# Altium PCB PCB1.PcbDoc
Units mm, origin at the board's own origin, x right, y up, seen from the top; angles counter-clockwise.
Board outline 75.8 x 25.8 mm, 2 copper layers (Top Layer, Bottom Layer), stack 0.771 mm thick; 54 components, 33 nets, 189 pads, 183 vias.
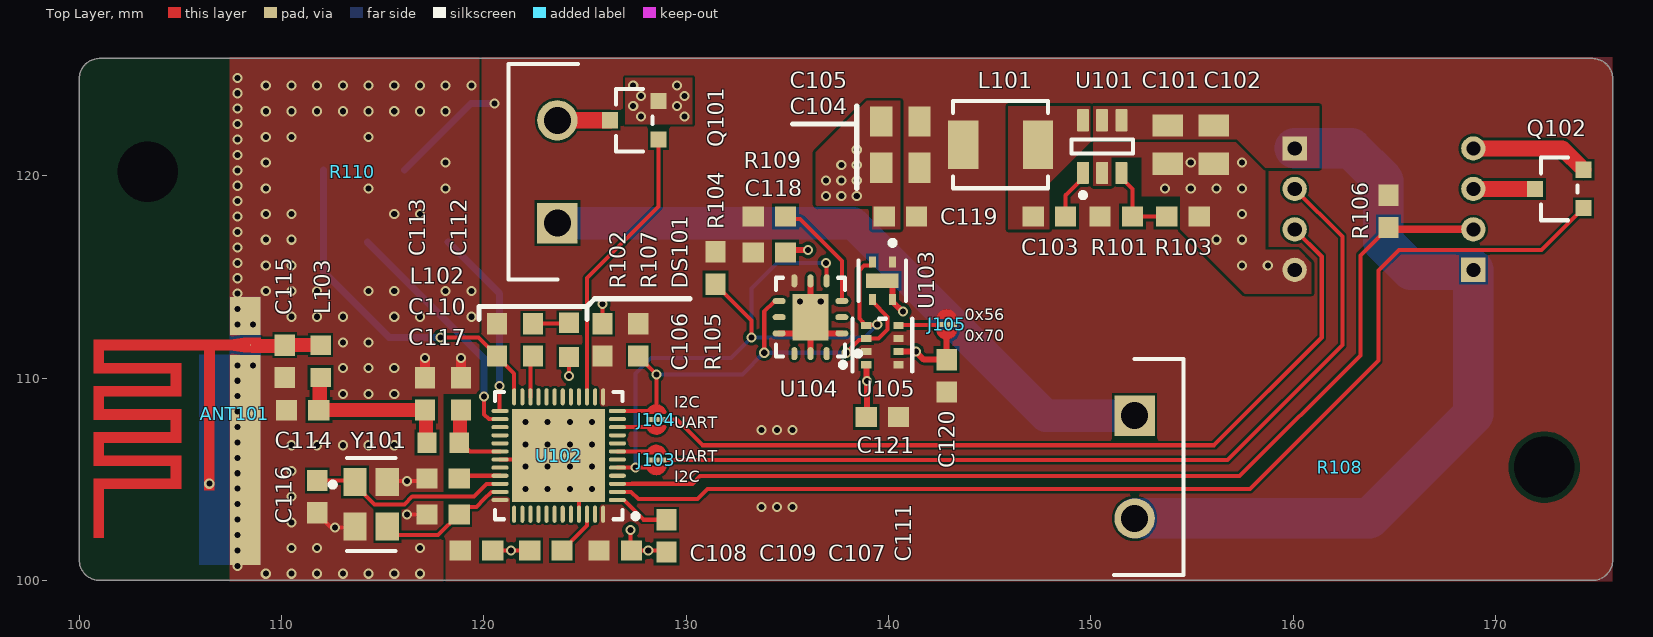
[diagram p0: Top Layer view]
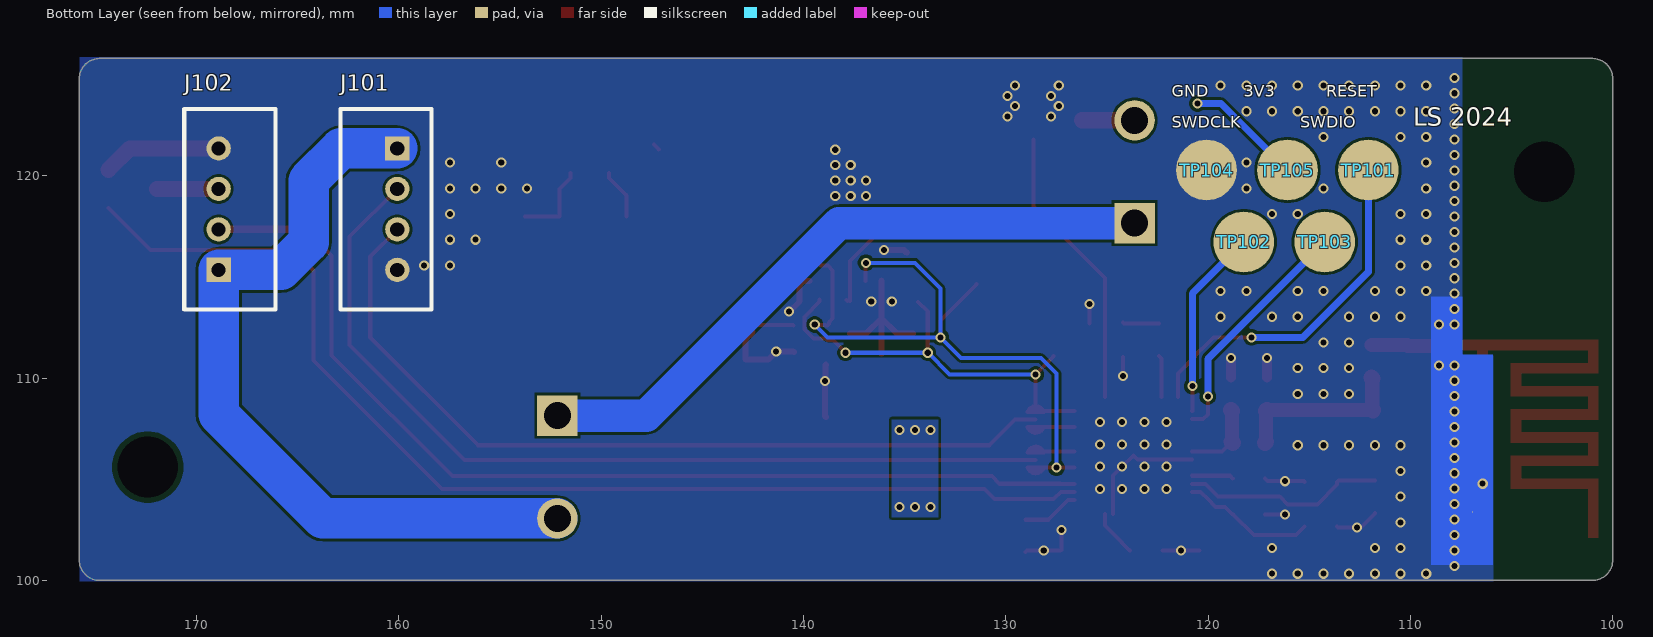
[diagram p1: Bottom Layer view, seen from below]
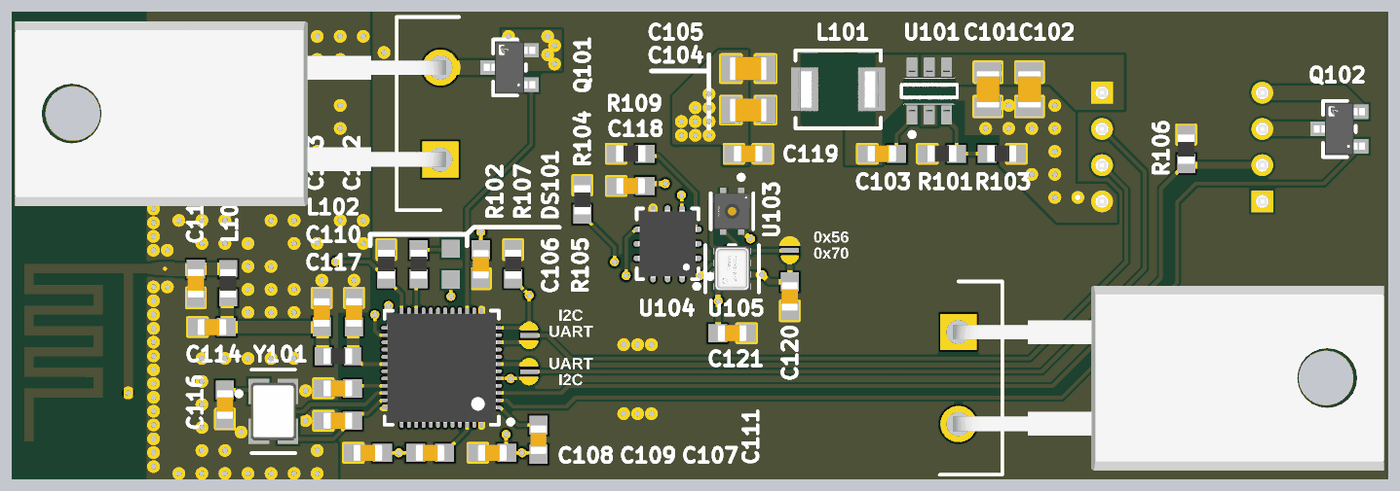
[diagram p2: 3D render of the assembled board from above, using the file's embedded part models]

## Layer stack, top to bottom
Top Solder: solder mask 0.0102, Solder Resist, Dk 3.5
Top Layer: signal copper 0.0356
Dielectric 1: dielectric 0.7, FR-4, Dk 4.8
Bottom Layer: signal copper 0.0356
Bottom Solder: solder mask 0.0102, Solder Resist, Dk 3.5

## Board outline
100,101 100,124.8 cw(c101,124.8) 101,125.8 174.8,125.8 cw(c174.8,124.8) 175.8,124.8 175.8,101 cw(c174.8,101) 174.8,100 101,100 cw(c101,101)

## Design rules (kind name [scope] priority, off if disabled: settings)
Clearance [All] p1: gap=0.127 ignorepadtopadclearanceinfootprint=TRUE except(0.254: Arc-Hole Track-Hole SMDPad-Hole THPad-THPad THPad-Hole Via-Hole Fill-Hole Poly-Hole Region-Hole Text-Hole)
PolygonConnect [All] p1: connectstyle=Direct reliefconductorwidth=0.254 reliefentries=4 polygonreliefangle="90 Angle" airgapwidth=0.254
RoutingVias [All] p1: holewidth=0.3 width=0.5 viastyle="Through Hole" minholewidth=0.3 minwidth=0.5 maxholewidth=2539.975 maxwidth=2539.975
SolderMaskExpansion SolderMaskExpansion_VIA [IsVia] p1: expansion=-100 istentingtop=FALSE
SolderMaskExpansion [All] p2: expansion=0.102 istentingtop=FALSE
SupplyNets "Schematic Supply Nets_2" [InNet('GND')] p1: voltage=0.000
SupplyNets "Schematic Supply Nets_1" [InNet('+3V3')] p2: voltage=0.000
SupplyNets "Schematic Supply Nets" [InNet('+24')] p3: voltage=0.000
Width [All] p1: maxlimit=254 minlimit=0.127 preferedwidth=0.2
30 further rules are at their usual default settings.

## Components (designator, comment, footprint, x,y, rotation, side; value= is the part's Value field where it differs from the comment)
ANT101 "BT_ANT" INV_F_2.4_50R2L08mm 108.967,114.05 r270 top
C101 "4u7" CAPC2013X13N 153.797,121.539 r90 top value=1p
C102 "4u7" CAPC2013X13N 156.083,121.539 r90 top value=1p
C103 "100n" CAPC1608X09N 147.955,117.983 r180 top value=1p
C104 "10u" CAPC2013X13N 140.589,120.396 r0 top value=1p
C105 "10u" CAPC2013X13N 140.589,122.682 r0 top value=1p
C106 "100n" CAPC1608X09N 125.857,111.887 r270 top value=1p
C107 "100n" CAPC1608X09N 126.492,101.473 r180 top value=1p
C108 "4u7" CAPC1608X09N 119.634,101.473 r180 top value=1p
C109 "1u" CAPC1608X09N 123.063,101.473 r0 top value=1p
C110 "100p" CAPC1608X09N 117.983,105.029 r180 top value=1p
C111 "100n" CAPC1608X09N 129.032,102.197 r270 top value=1p
C112 "0p8" CAPC1608X09N 118.872,109.22 r270 top value=1p
C113 "Capacitor" CAPC1608X09N 117.094,109.22 r270 top value=1p
C114 "Capacitor" CAPC1608X09N 111.043,108.413 r0 top locked value=1p
C115 "Capacitor" CAPC1608X09N 110.154,110.826 r90 top locked value=1p
C116 "12p" CAPC1608X09N 111.76,104.14 r90 top value=1p
C117 "12p" CAPC1608X09N 117.983,103.251 r0 top value=1p
C118 "100n" CAPC1608X09N 134.112,116.205 r180 top value=1p
C119 "100n" CAPC1608X09N 140.589,117.983 r0 top value=1p
C120 "1u" CAPC1608X09N 142.875,110.109 r270 top value=1p
C121 "1u" CAPC1608X09N 139.7,108.077 r0 top value=1p
DS101 "KP-1608SECK" KING-0603LED_ORANGE_V 124.206,111.887 r90 top
J101 "B4B-PH-K(LF)(SN)" FP-B4B-PH-K_LF_SN-MFG 160.63,118.35 r90 bottom locked
J102 "B4B-PH-K(LF)(SN)" FP-B4B-PH-K_LF_SN-MFG 168.36,118.35 r270 bottom locked
J103 "Solder Jumper" Solderbridge_3Way_New#1 128.524,106.46 r270 top
J104 "Solder Jumper" Solderbridge_3Way_New#2 128.524,107.442 r90 top
J105 "Solder Jumper" Solderbridge_3Way_New#3 142.875,112.141 r90 top
L101 "12uH" FP-SRP4020TA-MFG 145.542,121.539 r180 top
L102 "3n9" INDC1608X06N 117.983,106.807 r180 top
L103 "Inductor" INDC1608X06N 111.932,110.826 r90 top locked
Q101 "AO3400A" FP-SOT23-MFG 127.438,122.742 r180 top
Q102 "AO3400A" FP-SOT23-MFG 173.158,119.35 r180 top
R101 "51k" RESC1608X06N 151.257,117.983 r180 top
R102 "10k" RESC1608X06N 120.65,111.887 r90 top
R103 "22k1" RESC1608X06N 154.559,117.983 r180 top
R104 "10k" RESC1608X06N 131.445,115.443 r90 top
R105 "10k" RESC1608X06N 127.635,111.887 r90 top
R106 "<1k" RESC1608X06N 164.719,118.237 r90 top
R107 "470R" RESC1608X06N 122.428,111.887 r90 top
R108 "10R" TO508P344X1041X2058-2P_FLAT 152.17,108.14 r270 top
R109 "DNP" RESC1608X06N 134.112,117.983 r180 top
R110 "10R" TO508P344X1041X2058-2P_FLAT 123.63,117.66 r90 top locked
TP101 "TestPoint" TestPoint_3mm 112.078,120.284 r90 top
TP102 "TestPoint" TestPoint_3mm 118.238,116.728 r90 top
TP103 "TestPoint" TestPoint_3mm 114.238,116.728 r90 top
TP104 "TestPoint" TestPoint_3mm 120.078,120.284 r90 top
TP105 "TestPoint" TestPoint_3mm 116.078,120.284 r90 top
U101 "TPS560430XDBVR" FP-DBV0006A-MFG 150.561,121.442 r90 top
U102 "NRF52832" QFN40P600X600X85_HS-49N 123.698,106.172 r180 top locked
U103 "SHTC3" FP-SHTC3-MFG 139.7,114.808 r270 top
U104 "Smart CO2 sensor based on thermal conductivity" QFN80P300X350X110_HS-13N 136.144,113.008 r180 top
U105 "2SMPB-02E" FP-2SMPB-02E-MFG 139.7,111.633 r180 top
Y101 "3225 XO 32MHz" FP-TSX-3225-MFG 114.427,103.759 r270 top

## Footprints (in the part's own frame and the unit in brackets; to place one, negate y for a bottom-side part, rotate by r counter-clockwise, add the part's x,y. Pads: shape width x height; smd on the part's side, far side on the other; paste and mask are expansions set on the pad)
CAPC1608X09N [mm] "Chip Capacitor, 2-Leads, Body 1,55x0,85mm, IPC Medium Density"
  rect 1.05x1 smd: 1(-0.8,0) 2(0.8,0)
  body extent -0.8,-0.45 0.8,0.45, height 0.9
CAPC2013X13N [mm] "Chip Capacitor, 2-Leads, Body 2,03x1,27mm, IPC Medium Density"
  rect 1.1x1.5 smd: 1(-0.95,0) 2(0.95,0)
  body extent -1.01,-0.64 1.01,0.64, height 1.27
FP-2SMPB-02E-MFG [mm]
  rect 0.5x0.35 smd paste+0 mask+0: 1(0.8,0.975) 2(0.8,0.325) 3(0.8,-0.325) 4(0.8,-0.975) 5(-0.8,-0.975) 6(-0.8,-0.325) 7(-0.8,0.325) 8(-0.8,0.975)
  silkscreen extent -1.48,-1.3 2.07,1.3, body extent -1.55,-1.8 1.55,1.8, height 0.25
FP-B4B-PH-K_LF_SN-MFG [mm]
  rect 1.2x1.2 hole 0.7 paste-2539.97 mask+0: 1(3,-0.55)
  round 1.2 hole 0.7 paste-2539.97 mask+0: 2(1,-0.55) 3(-1,-0.55) 4(-3,-0.55)
  silkscreen extent -4.95,-2.25 4.95,2.25, body extent -4.95,-2.25 4.95,2.25, height 6
FP-DBV0006A-MFG [mm]
  rrect17% 1.1x0.6 smd paste+0 mask+0: 1(-1.3,0.95) 2(-1.3,0) 3(-1.3,-0.95) 4(1.3,-0.95) 5(1.3,0) 6(1.3,0.95)
  silkscreen extent -2.52,-1.53 0.35,1.53, body extent -1.95,-1.78 1.95,1.78, height 0.25
FP-SHTC3-MFG [mm]
  rect 0.55x0.35 smd paste-1000 mask-1000: 1(-0.925,0.5) 2(-0.925,-0.5) 3(0.925,-0.5) 4(0.925,0.5)
  rect 0.7x1.6 smd paste-1000 mask+0: 5(0,0)
  silkscreen extent -2,-1.17 1,1.17, body extent -1.4,-1.1 1.4,1.1, height 0.25
FP-SOT23-MFG [mm]
  rect 0.8x0.8 smd paste+0 mask+0: 1(-1.2,0.95) 2(-1.2,-0.95) 3(1.2,0)
  silkscreen extent -0.9,-1.55 0.9,1.55, body extent -1.7,-1.78 1.7,1.78, height 0.25
FP-SRP4020TA-MFG [mm]
  rect 1.5x2.4 smd paste+0 mask+0: 1(-1.85,0) 2(1.85,0)
  silkscreen extent -2.35,-2.15 2.35,2.15, body extent -2.7,-2.25 2.7,2.25, height 0.25
FP-TSX-3225-MFG [mm]
  rect 1.4x1.15 smd paste+0 mask+0: 1(-1.1,-0.8) 2(1.1,-0.8) 3(1.1,0.8) 4(-1.1,0.8)
  silkscreen extent -2.3,-2.02 2.3,1.2, body extent -1.9,-1.48 1.9,1.48, height 0.25
INDC1608X06N [mm] "Chip Inductor, 2-Leads, Body 1,55x0,85mm, IPC Medium Density"
  rect 0.95x1 smd: 1(-0.8,0) 2(0.8,0)
  body extent -0.8,-0.45 0.8,0.45, height 0.6
INV_F_2.4_50R2L08mm [mil]
  round 1 smd: 1(95.15,-20.05)
  rect 74.45x60 smd paste-1000 mask-1000: 2(38.5,-30)
  rect 408.74x60 smd paste-1000 mask-1000: 2(318.5,-30)
  round 1 smd far side mask-1000: 2(420,-80)
  Top Layer region: 80.65,-0.05 109.55,-0.05 109.55,-33.96 105.14,-60.05 105.14,-89.57 378.15,-90.05 378.15,-110.05 105.14,-110.05 105.14,-305.05 130.15,-305.05 130.15,-155.05 195.15,-155.05 195.15,-305.05 220.13,-305.05 220.13,-155.05 285.15,-155.05 285.15,-305.05 310.15,-305.05 310.15,-155.05 375.15,-155.05 375.15,-305.05 470.15,-305.05 470.15,-325.05 355.15,-325.05 355.15,-175.05 330.45,-175.05 330.15,-325.05 265.15,-325.05 265.15,-175.05 240.13,-175.05 240.13,-325.05 175.15,-325.05 175.15,-175.05 150.15,-175.05 150.15,-325.05 85.14,-325.05 85.14,-60.05 80.65,-33.84
  Bottom Layer region: 522.8,0 1.4,0 1.4,-60 114.15,-60 114.15,-120 522.8,-120
KING-0603LED_ORANGE_V [mm] "SMT LED, 2-Leads, Body 1.6x0.8mm (0603-Size)"
  rect 1x1 smd paste+0 mask+0: 1(0.85,0) 2(-0.85,0)
  body extent -0.92,-0.53 1.09,0.53, height 1.1
QFN40P600X600X85_HS-49N [mm] "QFN, 48-Leads, Body 6,00x6,00mm, Pitch 0,40mm, Thermal Pad 4,60x4,60mm, IPC Medium Density"
  oval 0.85x0.2 smd: 1(-2.9,2.2) 2(-2.9,1.8) 3(-2.9,1.4) 4(-2.9,1) 5(-2.9,0.6) 6(-2.9,0.2) 7(-2.9,-0.2) 8(-2.9,-0.6) 9(-2.9,-1) 10(-2.9,-1.4) 11(-2.9,-1.8) 12(-2.9,-2.2) 25(2.9,-2.2) 26(2.9,-1.8) 27(2.9,-1.4) 28(2.9,-1) 29(2.9,-0.6) 30(2.9,-0.2) 31(2.9,0.2) 32(2.9,0.6) 33(2.9,1) 34(2.9,1.4) 35(2.9,1.8) 36(2.9,2.2)
  oval 0.2x0.85 smd: 13(-2.2,-2.9) 14(-1.8,-2.9) 15(-1.4,-2.9) 16(-1,-2.9) 17(-0.6,-2.9) 18(-0.2,-2.9) 19(0.2,-2.9) 20(0.6,-2.9) 21(1,-2.9) 22(1.4,-2.9) 23(1.8,-2.9) 24(2.2,-2.9) 37(2.2,2.9) 38(1.8,2.9) 39(1.4,2.9) 40(1,2.9) 41(0.6,2.9) 42(0.2,2.9) 43(-0.2,2.9) 44(-0.6,2.9) 45(-1,2.9) 46(-1.4,2.9) 47(-1.8,2.9) 48(-2.2,2.9)
  rect 4.6x4.6 smd: 49(0,0)
  silkscreen extent -3.93,-3.15 3.15,3.15, body extent -3.02,-3.02 3.02,3.02, height 0.85
QFN80P300X350X110_HS-13N [mm] "QFN, 12-Leads, Body 3,00x3,50mm, Pitch 0,80mm, Thermal Pad 1,80x2,30mm, IPC Medium Density"
  oval 0.65x0.3 smd: 1(-1.55,0.8) 2(-1.55,0) 3(-1.55,-0.8) 7(1.55,-0.8) 8(1.55,0) 9(1.55,0.8)
  oval 0.3x0.65 smd: 4(-0.8,-1.8) 5(0,-1.8) 6(0.8,-1.8) 10(0.8,1.8) 11(0,1.8) 12(-0.8,1.8)
  rect 1.8x2.3 smd: 13(0,0)
  silkscreen extent -2.48,-1.95 1.7,1.95, body extent -1.6,-1.85 1.6,1.85, height 1.1
RESC1608X06N [mm] "Chip Resistor, 2-Leads, Body 1,55x0,85mm, IPC Medium Density"
  rect 1.05x1 smd: 1(-0.8,0) 2(0.8,0)
  body extent -0.8,-0.45 0.8,0.45, height 0.6
Solderbridge_3Way_New#1 [mil]
  round 1 smd paste-393.7: 1(0,0) 2(40,0)
  rect 10x39.37 smd mask+0: 3(20,0)
  Top Layer region: 33.72,-16.95 31.66,-12.7 31.38,-7.99 32.93,-3.53 36.06,0 36.06,0 32.93,3.53 31.38,7.99 31.66,12.7 33.72,16.95 33.72,16.95 38.66,14.63 42.34,10.59 44.19,5.45 43.94,0 43.94,0 44.19,-5.45 42.34,-10.59 38.66,-14.63 33.72,-16.95
  Top Layer region: 6.28,-16.95 1.34,-14.63 -2.34,-10.59 -4.19,-5.45 -3.94,0 -3.94,0 -4.19,5.45 -2.34,10.59 1.34,14.63 6.28,16.95 6.28,16.95 8.34,12.7 8.62,7.99 7.07,3.53 3.94,0 3.94,0 7.07,-3.53 8.62,-7.99 8.34,-12.7 6.28,-16.95
  Top Layer lines w5.91: 33.72,-16.95 33.72,0 33.72,16.95 ; 6.28,-16.95 6.28,0 6.28,16.95
  Top Layer lines w6: 33.72,-16.95 ccw(c29.37,0) 34.96,-16.58 ccw(c29.37,0) 35.12,-16.53 ccw(c29.37,0) 40,-13.9 ccw(c29.37,0) 46.87,0 ccw(c29.37,0) 40,13.9 ccw(c29.37,0) 36.38,16.04 ccw(c29.37,0) 33.72,16.95 ; 6.28,-16.95 cw(c10.63,0) 3.62,-16.04 cw(c10.63,0) 3.46,-15.97 cw(c10.63,0) 4.88,16.53 cw(c10.63,0) 6.28,16.95
Solderbridge_3Way_New#2 [mil]
  round 1 smd paste-393.7: 1(0,0) 2(40,0)
  rect 10x39.37 smd mask+0: 3(20,0)
  Top Layer region: 33.72,-16.95 31.66,-12.7 31.38,-7.99 32.93,-3.53 36.06,0 36.06,0 32.93,3.53 31.38,7.99 31.66,12.7 33.72,16.95 33.72,16.95 38.66,14.63 42.34,10.59 44.19,5.45 43.94,0 43.94,0 44.19,-5.45 42.34,-10.59 38.66,-14.63 33.72,-16.95
  Top Layer region: 6.28,-16.95 1.34,-14.63 -2.34,-10.59 -4.19,-5.45 -3.94,0 -3.94,0 -4.19,5.45 -2.34,10.59 1.34,14.63 6.28,16.95 6.28,16.95 8.34,12.7 8.62,7.99 7.07,3.53 3.94,0 3.94,0 7.07,-3.53 8.62,-7.99 8.34,-12.7 6.28,-16.95
  Top Layer lines w5.91: 6.28,16.95 6.28,0 6.28,-16.95 ; 33.72,16.95 33.72,0 33.72,-8.48 33.72,-16.95
  Top Layer lines w6: 6.28,16.95 ccw(c10.63,0) 5.12,16.61 ccw(c10.63,0) 3.39,-15.93 ccw(c10.63,0) 6.28,-16.95 ; 33.72,16.95 cw(c29.37,0) 36.61,15.93 cw(c29.37,0) 40,13.9 cw(c29.37,0) 46.87,0 cw(c29.37,0) 45.86,-5.86 cw(c29.37,0) 34.88,-16.61 cw(c29.37,0) 33.72,-16.95
Solderbridge_3Way_New#3 [mil]
  round 1 smd paste-393.7: 1(0,0) 2(40,0)
  rect 10x39.37 smd mask+0: 3(20,0)
  Top Layer region: 6.28,-16.95 1.34,-14.63 -2.34,-10.59 -4.19,-5.45 -3.94,0 -3.94,0 -4.19,5.45 -2.34,10.59 1.34,14.63 6.28,16.95 6.28,16.95 8.34,12.7 8.62,7.99 7.07,3.53 3.94,0 3.94,0 7.07,-3.53 8.62,-7.99 8.34,-12.7 6.28,-16.95
  Top Layer region: 33.72,-16.95 31.66,-12.7 31.38,-7.99 32.93,-3.53 36.06,0 36.06,0 32.93,3.53 31.38,7.99 31.66,12.7 33.72,16.95 33.72,16.95 38.66,14.63 42.34,10.59 44.19,5.45 43.94,0 43.94,0 44.19,-5.45 42.34,-10.59 38.66,-14.63 33.72,-16.95
  Top Layer lines w5.91: 6.28,16.95 6.28,0 6.28,-16.95 ; 33.72,16.95 33.72,-16.95
  Top Layer lines w6: 6.28,16.95 ccw(c10.63,0) -6.87,0 ccw(c10.63,0) 6.28,-16.95 ; 33.72,16.95 cw(c29.37,0) 33.72,-16.95
TestPoint_3mm [mm]
  round 3 smd far side: TP(0,0)
TO508P344X1041X2058-2P_FLAT [mm]
  rect 1.995x1.995 / inner round 1.995 / far side rect 1.995x1.995 hole 1.33: 1(0,0)
  round 1.995 hole 1.33: 2(5.08,0)
  round 0 hole 3: 8(2.54,20.25)
  silkscreen extent -2.8,-1.03 7.88,2.41, body extent -2.56,-0.29 7.64,23.44, height 4

## Part data
C101 C102 C104 C105: library part C0805, "Capacitor"
C103 C106 C107 C108 C109 C110 C111 C112 C116 C117 C118 C119 C120 C121: library part C0603, "Capacitor"
C113 C114 C115: library part C0603
DS101: library part "LED Orange", "LED, SMT, 0603(1608), 1.1mm thickness, Orange", Forward Current="30 mA", Manufacturer=Kingbright, Power Dissipation="75 mW", Reverse Voltage="5 V", Storage Temperature="-40 to +85 degC", ComponentLink1Description="Manufacturer URL", ComponentLink1URL=http://www.kingbright.com/, ComponentLink2Description=Datasheet, ComponentLink2URL=http://www.kingbright.com/manager/upload/pdf/(1366274642)KP-1608SECK(Ver.14A).pdf, Mounting Technology="Surface Mount", PackageDescription="2-Pin SMT LED, 1.6 x 0.8 mm Pitch", PackageReference=0603LED_ORANGE, Packing Type="2000 pcs / reel", PartNumber=KP-1608SECK
J101 J102: library part CMP-17439-000414-1, "CONN HEADER VERT 4POS 2MM", Color=Beige, Flammability Rating="UL94 V-0", Housing Color=White, Voltage Rating=100V, Connector Type=Header, Contact Finish - Mating=TIN, Contact Material=Brass, Contact Mating Length=0.13inch, Contact Plating=Tin, Contact Shape=Square, Contact Type="Male Pin", Fastening Type=Detent, Housing Material=Nylon, Insulation Color=Beige, Insulation Material=Nylon, Lead Free="Lead Free", Mated Stacking Heights=8mm, Mount="Through Hole", Number of Contacts=4, Number of Positions=4, Number of Rows=1, Packaging=Bulk, Pitch=2mm, Series=PH, Termination=Press-Fit
J103 J104 J105: library part "Solder Jumper_3Way"
L101: library part CMP-07248-000008-1, "FIXED IND 12UH 2A 76 MOHM SMD", Inductance=3.3uH, Manufacturer=Bourns, Manufacturer Part Number=SRP4020TA-3R3M, Package=SRP4020TA, Rms Current=3.5A, Saturation Current=4A, Self Resonant Frequency=40MHz, Series Resistance=76mΩ, Temperature="-40°C to +150°C", Temperature Range High=+150°C, Temperature Range Low=-40°C, Test Frequency=100kHz, Tolerance=20%, Automotive=Yes, Automotive Grade="Grade 0", Category=Ind, ComponentLink2Description=Datasheet, ComponentLink2URL=https://www.bourns.com/docs/Product-Datasheets/SRP4020TA.pdf, Composition=Wirewound, Core Material="Carbonyl Powder", Device Class L1="Passive Components", Device Class L2=Inductors, Device Class L3="Fixed Inductors", Digikey Description="FIXED IND 3.3UH 3.5A 76 MOHM SMD", Height=2.1mm, Lead Free=Yes, Mouser Description="Ind Power Shielded Wirewound 3.3uH 20% 100KHz Carbonyl Powder 3.5A T/R", Octopart=https://octopart.com/srp4020ta-3r3m-bourns-47300338, Q Factor=10, RoHS=TRUE, Shielding=true
L102: library part L0603, "Inductor"
L103: library part L0603
Q101 Q102: library part CMP-83955-000006-1, "MOSFET N-CH 30V 5.7A SOT23", Case/Package=SOT-23, Continuous Drain Current (ID)=5.7A, Drain to Source Voltage (Vdss)=30V, Gate to Source Voltage (Vgs)=12V, Input Capacitance=630pF, Max Operating Temperature=150°C, Max Power Dissipation=1.4W, Min Operating Temperature=-55°C, Lead Free="Lead Free", Mount="Surface Mount", Number of Elements=1, Number of Pins=3, Packaging="Tape and Reel", Power Dissipation=1.4W, Radiation Hardening=No, Rds On Max=26.5mR
R101 R102 R103 R104 R105 R106 R107 R109: library part R0603, "Resistor"
R108 R110: library part MP930, "Caddock Power Resistor"
U101: library part CMP-04918-000083-1, "IC REG BUCK PFM 600MA SOT23-6", Manufacturer="Texas Instruments", Max Junction Temp=+125°C, Max Supply Voltage=36V, Min Supply Voltage=4V, Nominal Supply Current=80uA, Output Current=600mA, Output Voltage=1-24V, Package=DBV0006A, Switching Frequency=1.1MHz, Temperature="-40°C to +125°C", Temperature Range Low=-40°C, Automotive=No, Category=IC, ComponentLink2Description=Datasheet, ComponentLink2URL=http://www.ti.com/lit/ds/symlink/tps560430.pdf, Device Class L1="Integrated Circuits (ICs)", Device Class L2="Power Management ICs", Device Class L3="Voltage Regulators - Switching", Digikey Description="IC REG BUCK PFM 600MA SOT23-6", Height=1.45mm, Lead Free=Yes, Manufacturer Part Number=TPS560430XDBVR, Max Duty Cycle=98%, Mouser Description="SIMPLE SWITCHER® 36-V, 600-mA Buck Regulator With High-Efficiency Sleep Mode 6-SOT-23 -40 to 125", Number Of Outputs=1, Octopart=https://octopart.com/tps560430xdbvr-texas+instruments-93105742, Output Type=AdjustableProgrammable, RoHS=TRUE, Standoff Height=0mm, Switching Topology=Buck, Temperature Range High=+125°C
U103: library part CMP-144040-000003-1, "SENSOR HUMI/TEMP I2C 2% SMD", Manufacturer=Sensirion, Max Supply Voltage=3.6V, Min Supply Voltage=1.62V, Operating Supply Current=0.3-900uA, Package=0, Temperature="-40°C to +125°C", Temperature Range High=+125°C, Temperature Range Low=-40°C, Accuracy=2%, Automotive=No, Category=IC, ComponentLink2Description=Datasheet, ComponentLink2URL=https://www.sensirion.com/fileadmin/user_upload/customers/sensirion/Dokumente/0_Datasheets/Humidity/Sensirion_Humidity_Sensors_SHTC3_Datasheet.pdf, Device Class L1=Sensors, Device Class L2="Temperature and Humidity Sensors", Device Class L3=unset, Digikey Description="SENSOR HUMI/TEMP I2C 2% SMD", Height=0.75mm, Interface=I2C, Ipc Land Pattern Name=DFN200X200X75-4, Lead Free=Yes, Manufacturer Part Number=SHTC3, Mouser Description="SHTC3 Series 0 to 100% RH 3.6 V Humidity and Temperature Sensor IC - DFN-4", Octopart=https://octopart.com/shtc3-sensirion-91912225, Resolution=16bits, RoHS=TRUE, Sensor Output=I2C
U104: library part STC31-C
U105: library part CMP-08765-000002-1, "BAROMETRIC DGTL PRESS SENS 9LGA", Manufacturer=Omron, Max Supply Voltage=3.6V, Min Supply Voltage=1.2V, Operating Supply Current=410-640uA, Temperature="-40°C to +85°C", Temperature Range High=+85°C, Temperature Range Low=-40°C, Automotive=No, Category=IC, ComponentLink2Description=Datasheet, ComponentLink2URL=https://omronfs.omron.com/en_US/ecb/products/pdf/en_2smpb_02e.pdf, Device Class L1=Sensors, Device Class L2="Pressure Sensors", Device Class L3=unset, Digikey Description="BAROMETRIC DGTL PRESS SENS 9LGA", Height=0.95mm, Lead Free=Yes, Manufacturer Part Number=2SMPB-02E, Octopart=https://octopart.com/2smpb-02e-omron-87757861, Package=2SMPB-02E, Port Style="No Port", RoHS=TRUE, Sensor Output=I2C,SPI
Y101: library part CMP-36405-000018-1, "CRYSTAL 32.0000MHZ 9PF SMD", Case/Package=SMD/SMT, ESR (Equivalent Series Resistance)=40R, Frequency=24MHz, Frequency Stability=20ppm, Frequency Tolerance=10ppm, Load Capacitance=9pF, Max Operating Temperature=105°C, Min Operating Temperature=-40°C, Package Quantity=250, Depth=2.5mm, Drive Level=200uW, Height=0.024inch, Lead Free="Lead Free", Length=3.2mm, Mount="Surface Mount", Number of Pins=4, Packaging="Tape and Reel", RoHS Compliant=Yes, Series=TSX-3225, Termination=SMD/SMT, Tolerance=10ppm, Weight=0.000564oz, Width=2.5mm

## Via types
v1: diameter 0.5, hole 0.3, Top Layer to Bottom Layer, 183 vias

## Nets (pads, with @x,y where several pads share a name; then routed paths per layer and width w, separated by ;. In a path a pad name is that pad's centre, name@x,y a point inside that pad or via, vN(x,y) a via of type N, cw(c..) or ccw(c..) an arc to the next point about the centre after c; other vN are vias at no path point)
+3V3: C104.2 C105.2 C106.2 C107.2 C108.2 C118.2 C119.2 C120.2 C121.2 J105.2 L101.2 R101.2 R102.2 R104.2 R105.2 R106.2 R109.2 TP105.TP U102.13 U102.36 U102.48 U103.1 U104.6 U105.2 U105.6 U105.8 | length 5.8
  Bottom Layer w0.35: TP105.TP 119.365,123.571 v1(120.523,123.571)
  other v1: 133.731,103.632 134.493,103.632 135.255,103.632 133.731,107.442 134.493,107.442 135.255,107.442
+24: C101.2 C102.2 J101.1 J102.1 R108.2 U101.4 U101.5 | length 39.1
  Bottom Layer w2: R108.2 163.766,103.06 168.91,108.204 J102.1 165.828,115.35 164.465,116.713 164.465,119.761 162.876,121.35 J101.1
CONN_1: J101.2 J103.3 | length 45
  Top Layer w0.2: J103.3 156.752,105.952 162.433,111.633 162.433,116.997 J101.2
CONN_2: J101.3 J104.3 | length 41.5
  Top Layer w0.2: J104.3 129.54,107.95 130.81,106.68 156.083,106.68 161.417,112.014 161.417,116.013 J101.3
GND: ANT101.2 C101.1 C102.1 C104.1 C105.1 C106.1 C107.1 C108.1 C109.1 C110.2 C111.2 C112.1 C113.1 C114.1 C115.1 C116.1 C117.1 C118.1 C119.1 C120.1 C121.1 DS101.2 J101.4 J102.4 J105.1 Q101.2 Q102.2 R103.1 TP104.TP U101.2 U102.31 U102.45 U102.49 U103.4 U103.5 U104.1 U104.5 U104.9 U104.11 U104.13 U105.1 U105.7 Y101.2 Y101.4 | length 42.9
  Top Layer w0.2: C116.1 111.76,103.315 112.402,102.673 112.592,102.673 v1(112.649,102.616) 113.584,102.616 Y101.2 ; Y101.4 115.27,104.902 v1(116.205,104.902) 117.056,104.902 C110.2 ; v1(116.206,103.251) C117.1 ; C108.1 C109.1 ; U102.31 123.498,105.972 U102.49 v1(124.248,105.622) 124.698,105.172 U102.45 ; v1(124.206,110.109) DS101.2 ; C106.1 v1(125.857,113.665) ; v1(127.254,102.489) 127.254,101.511 C107.1 128.956,101.473 C111.2
  Top Layer w0.3: U104.9 135.394,112.208 U104.13@136.144,112.958 ; C118.1@134.887,116.205 C118.1 135.039,116.332 v1(136.017,116.332) ; U104.11 U104.13@136.144,112.958 ; U104.5@136.144,114.818 U104.5 U104.13 U104.13@136.144,112.958 ; U104.1 136.894,112.208 U104.13@136.144,112.958 ; C121.1 138.938,108.115 v1(138.938,109.855) 138.919,109.874 138.919,110.639 U105.1 ; U103.5 140,114.808 140.2,114.608 U103.4 140.2,113.783 140.699,113.284 v1(140.716,113.284) ; U105.7@140.475,111.283 U105.7 v1(141.35,111.308) 141.749,110.909 C120.1 142.875,111.966 J105.1
  Top Layer w0.5: C113.1 v1(117.094,110.998) ; C112.1 v1(118.872,110.998)
  Top Layer w0.8: J102.4 173.308,121.35 Q102.2
  other v1: 109.22,100.33 110.49,100.33 111.76,100.33 113.03,100.33 114.3,100.33 115.57,100.33 116.84,100.33 107.823,100.711 107.824,101.484 121.349,101.473 128.124,101.473 110.49,101.6 111.76,101.6 116.84,101.6 107.824,102.246 110.49,102.87 107.824,103.008 107.824,103.77 110.49,104.14 107.824,104.532 122.048,104.522 123.148,104.522 124.248,104.522 125.348,104.522 106.427,104.779 107.824,105.294 110.49,105.41 122.048,105.622 123.148,105.622 125.348,105.622 107.824,106.056 110.49,106.68 111.76,106.68 113.03,106.68 114.3,106.68 115.57,106.68 122.048,106.722 123.148,106.722 124.248,106.722 125.348,106.722 107.824,106.818 107.824,107.58 122.048,107.822 123.148,107.822 124.248,107.822 125.348,107.822 107.824,108.342 107.824,109.104 113.03,109.22 114.3,109.22 115.57,109.22 107.824,109.866 113.03,110.49 114.3,110.49 115.57,110.49 107.824,110.628 108.586,110.628 113.03,111.76 114.3,111.76 107.82,112.657 108.582,112.657 110.49,113.03 111.76,113.03 113.03,113.03 115.57,113.03 116.84,113.03 119.38,113.03 107.82,113.419 135.636,113.792 136.652,113.792 107.823,114.173 109.22,114.3 110.49,114.3 111.76,114.3 114.3,114.3 115.57,114.3 118.11,114.3 119.38,114.3 107.823,114.935 109.22,115.57 110.49,115.57 157.48,115.57 158.75,115.57 107.823,115.697 107.823,116.459 109.22,116.84 110.49,116.84 156.21,116.84 157.48,116.84 107.823,117.221 107.823,117.983 109.22,118.11 110.49,118.11 115.57,118.11 116.84,118.11 157.48,118.11 107.823,118.745 136.906,118.999 137.668,118.999 138.43,118.999 109.22,119.38 114.3,119.38 118.11,119.38 153.67,119.38 154.94,119.38 156.21,119.38 157.48,119.38 107.823,119.507 136.906,119.761 137.668,119.761 138.43,119.761 107.823,120.269 137.668,120.523 138.43,120.523 109.22,120.65 118.11,120.65 154.94,120.65 157.48,120.65 107.823,121.031 138.43,121.285 107.823,121.793 109.22,121.92 110.49,121.92 114.3,121.92 107.823,122.555 127.762,122.936 129.921,122.936 109.22,123.19 110.49,123.19 111.76,123.19 113.03,123.19 114.3,123.19 115.57,123.19 116.84,123.19 118.11,123.19 107.823,123.317 127.381,123.444 129.54,123.444 127.762,123.952 129.921,123.952 107.823,124.079 109.22,124.46 110.49,124.46 111.76,124.46 113.03,124.46 114.3,124.46 115.57,124.46 116.84,124.46 118.11,124.46 119.38,124.46 127.381,124.46 129.54,124.46 107.823,124.841
NetANT101_1: ANT101.1 C115.2 L103.2 | length 3.4
  Top Layer w0.7: 108.591,111.588 110.116,111.588 C115.2 L103.2
NetC103_1: C103.1 U101.1 | length 2.5
  Top Layer w0.2: C103.1 148.755,119.036 149.611,119.892 U101.1
NetC103_2: C103.2 L101.1 U101.6 | length 0.3
  Top Layer w0.2: L101.1@147.155,121.302 L101.1
NetC109_2: C109.2 U102.46 | length 2.3
  Top Layer w0.2: C109.2 123.888,101.473 124.288,101.873 124.288,101.898 125.098,102.708 U102.46
NetC110_1: C110.1 U102.33 | length 2.1
  Top Layer w0.2: C110.1 118.926,105.172 U102.33
NetC111_1: C111.1 U102.1 | length 2.8
  Top Layer w0.2: U102.1 126.923,103.972 127.898,102.997 C111.1
NetC112_2: C112.2 L102.1 U102.30 | length 3.6
  Top Layer w0.2: L102.1@118.999,106.68 119.307,106.372 U102.30
  Top Layer w0.7: L102.1@118.828,106.852 C112.2@118.828,108.376
  Top Layer w0.8: L102.1 L102.1@118.828,106.852 ; C112.2@118.828,108.376 C112.2
NetC113_2: C113.2 C114.2 L102.2 L103.1 | length 8.6
  Top Layer w0.7: C114.2@111.846,108.417 C113.2@117.091,108.417 ; C114.2@111.887,108.458 L103.1@111.887,109.982 ; L102.2@117.139,106.852 C113.2@117.139,108.376
  Top Layer w0.8: C114.2@111.846,108.417 C114.2 C114.2@111.887,108.458 ; L103.1@111.887,109.982 L103.1 ; C113.2@117.091,108.417 C113.2 C113.2@117.139,108.376 ; L102.2@117.139,106.852 L102.2
NetC116_2: C116.2 U102.34 Y101.1 | length 10
  Top Layer w0.2: C116.2 113.546,104.94 Y101.1 113.627,104.734 114.602,103.759 116.078,103.759 116.459,104.14 119.507,104.14 120.139,104.772 U102.34
NetC117_2: C117.2 U102.35 Y101.3 | length 6.6
  Top Layer w0.2: Y101.3 115.651,102.235 117.742,102.235 118.758,103.251 C117.2 119.164,103.632 119.629,103.632 120.01,104.013 120.015,104.013 120.374,104.372 U102.35
NetDS101_1: DS101.1 R107.2 | length 1.8
  Top Layer w0.2: R107.2 124.156,112.687 DS101.1
NetJ105_3: J105.3 U105.5 | length 2.1
  Top Layer w0.2: U105.5 140.521,112.628 142.6,112.628 J105.3@142.621,112.649
NetQ101_3: Q101.3 R110.2 | length 2.6
  Top Layer w0.8: R110.2 123.632,122.742 Q101.3
NetR101_1: R101.1 R103.2 U101.3 | length 4.1
  Top Layer w0.2: U101.3 151.511,119.892 152.057,119.346 R101.1 R103.2
NetR107_1: R107.1 U102.22 | length 2.1
  Top Layer w0.2: U102.22 122.298,110.957 R107.1
NetR108_1: R108.1 R110.1 | length 32.5
  Bottom Layer w1.6: R110.1 138.245,117.66 147.765,108.14 R108.1
NetR109_1: R109.1 U104.3 | length 5.7
  Top Layer w0.2: R109.1@134.912,117.856 135.636,117.856 137.694,115.798 U104.3 ; U104.3@137.818,113.808 U104.3@137.865,113.854
PWM1: Q101.1 U102.15 | length 14.2
  Top Layer w0.2: U102.15 125.098,114.938 128.638,118.478 Q101.1
PWM2: Q102.1 U102.2 | length 56.5
  Top Layer w0.2: U102.2 127.276,104.372 127.635,104.013 130.556,104.013 131.064,104.521 157.861,104.521 164.211,110.871 164.211,115.316 165.227,116.332 172.29,116.332 Q102.1
RES_N: R102.1 TP101.TP U102.24 | length 17.7
  Top Layer w0.2: v1(117.856,112.014) 119.723,112.014 120.3,111.437 120.325,111.437 120.65,111.112 R102.1 120.65,111.062 121.498,110.214 U102.24
  Bottom Layer w0.35: TP101.TP 112.078,115.252 115.316,112.014 v1(117.856,112.014)
RX: J103.1 U102.7 | length 2
  Top Layer w0.2: U102.7 128.118,106.372 128.436,106.372 J103.1
SCL: J103.2 R104.1 U102.5 U103.2 U104.4 U105.4 | length 34.5
  Top Layer w0.2: U102.5 v1(127.5,105.572) 128.103,105.572 ; R104.1 131.445,114.618 133.223,112.84 v1(133.223,112.014) ; v1(136.906,115.697) 136.925,115.678 136.925,114.827 U104.4 U104.4@136.944,114.983 ; U103.2 139.2,115.633 139.125,115.558 138.799,115.558 138.557,115.316 138.557,112.951 138.75,112.758 138.75,112.683 138.825,112.608 U105.4 138.92,112.628 139.425,112.628 v1(139.446,112.649)
  Bottom Layer w0.2: v1(127.5,105.572) 127.5,110.228 128.27,110.998 132.207,110.998 v1(133.223,112.014) ; v1(136.906,115.697) 134.493,115.697 133.223,114.427 v1(133.223,112.014) ; v1(139.446,112.649) 138.811,112.014 v1(133.223,112.014)
SDA: J104.2 R105.1 U102.12 U103.3 U104.7 U105.3 | length 21.4
  Top Layer w0.2: U102.12 128.119,108.372 ; R105.1 127.635,111.062 v1(128.524,110.173) 128.524,108.633 J104.2 ; v1(133.858,111.252) 133.858,113.284 U104.7@134.332,113.758 ; v1(137.922,111.252) 138.553,111.883 138.825,111.883 U105.3 139.517,111.958 139.954,112.395 139.954,113.029 139.2,113.783 U103.3
  Bottom Layer w0.2: v1(128.524,110.173) 132.779,110.173 v1(133.858,111.252) v1(137.922,111.252)
SW: J102.3 Q102.3 | length 3
  Top Layer w0.8: J102.3 Q102.3
SWDCLK: TP102.TP U102.25 | length 9.4
  Top Layer w0.2: v1(120.777,109.601) 120.777,108.372 U102.25
  Bottom Layer w0.35: TP102.TP 120.777,114.189 v1(120.777,109.601)
SWDIO: TP103.TP U102.26 | length 11.8
  Top Layer w0.2: v1(120.015,109.093) 120.015,108.204 120.247,107.972 U102.26
  Bottom Layer w0.35: TP103.TP 120.015,110.951 v1(120.015,109.093)
TEMP: J102.2 R106.1 U102.3 | length 50.4
  Top Layer w0.2: U102.3 127.323,104.772 127.326,104.775 130.302,104.775 130.683,105.156 157.353,105.156 163.322,111.125 163.322,116.055 164.592,117.325 R106.1@164.592,117.35
  Top Layer w0.381: R106.1@164.592,117.35 J102.2
TX: J104.1 U102.10 | length 2
  Top Layer w0.2: U102.10 128.102,107.572 128.394,107.572 J104.1
pads on no net: R108.8 R110.8 U102.4 U102.6 U102.8 U102.9 U102.11 U102.14 U102.16 U102.17 U102.18 U102.19 U102.20 U102.21 U102.23 U102.27 U102.28 U102.29 U102.32 U102.37 U102.38 U102.39 U102.40 U102.41 U102.42 U102.43 U102.44 U102.47 U104.2 U104.8 U104.10 U104.12

## Polygon pours and split planes (outlines as drawn)
GND on Top Layer "GND_L01_P006" (solid, pour order 6): 107.442,125.857 107.442,99.949 117.983,99.949 117.983,109.22 119.761,109.22 119.761,125.857
+3V3 on Top Layer "+3V3_L01_P007" (solid, remove dead copper, pour order 7): 119.761,125.857 119.761,109.22 117.983,109.22 117.983,99.949 175.768,99.949 175.768,125.857
GND on Top Layer "GND_L01_P001" (solid, pour order 1): 127,124.841 127,122.555 130.302,122.555 130.302,124.841
GND on Top Layer "GND_L01_P000" (solid, pour order 0): 140.589,118.497 140.589,117.353 139.192,117.353 139.192,118.506 136.398,118.484 136.398,121.158 138.938,123.698 140.589,123.698
GND on Top Layer "GND_L01_P005" (solid, pour order 5): 160.274,116.332 160.909,115.697 160.909,114.173 157.607,114.173 154.432,117.348 154.432,118.999 152.527,118.999 152.527,120.904 151.003,120.904 151.003,119.507 150.114,119.507 150.114,121.793 157.226,121.793 158.623,120.396 158.623,116.332
NetC103_2 on Top Layer "NETC103_2_L01_P004" (solid, pour order 4): 150.114,123.444 145.923,123.444 145.923,117.348 147.955,117.348 147.955,119.634 150.114,121.793
+24 on Top Layer "+24_L01_P002" (solid, pour order 2): 150.114,123.444 161.29,123.444 161.29,120.396 158.623,120.396 157.226,121.793 150.114,121.793
+3V3 on Bottom Layer "+3V3_L02_P003" (solid, pour order 3): 133.35,107.95 135.636,107.95 135.636,103.124 133.35,103.124
GND on Bottom Layer "GND_L02_P008" (solid, pour order 8): 105.907,111.11 107.442,111.11 107.442,113.919 107.442,125.857 175.768,125.857 175.768,99.949 105.907,99.949

## Silkscreen, mask and mechanical layers (free items; w line width, h text height)
Top Overlay:
  lines w0.254: 119.761,112.903 119.761,113.538 124.841,113.538 125.095,113.538 ; 125.095,112.903 125.095,113.538 ; 130.175,113.919 125.476,113.919 125.095,113.538 ; 135.255,122.555 138.43,122.555 138.43,119.38 138.43,123.444
  text "0x56" at 143.764,112.654 h1
  text "0x70" at 143.764,111.633 h1
  text "I2C" at 129.413,108.336 h1
  text "UART" at 129.413,107.315 h1
  text "UART" at 129.413,105.669 h1
  text "I2C" at 129.413,104.648 h1
Bottom Overlay:
  text "RESET" at 114.173,123.698 h1
  text "3V3" at 118.237,123.698 h1
  text "GND" at 121.793,123.698 h1
  text "LS 2024" at 109.855,122.174 h1.5
  text "SWDIO" at 115.443,122.174 h1
  text "SWDCLK" at 121.793,122.174 h1
Mechanical 1:
  circle w0.254: c137.9,112.9 r4
  lines w0.254: 100,101 ccw(c101,101) 101,100 174.8,100 ccw(c174.8,101) 175.8,101 175.8,124.8 ccw(c174.8,124.8) 174.8,125.8 101,125.8 ccw(c101,124.8) 100,124.8 100,101